# EAGLE board Mode Changer - Robotrox (EAGLE 9.7.0)

Size 221.02 x 156.86 mm. Coordinates in mm from the lower left corner, seen from the top.
Outline: 0,0 221.02,0 221.02,156.86 0,156.86 0,0
Copper layers (1*16): Top 0.035mm / dielectric 1.5mm / Bottom 0.035mm
Design rules "default": minimum track width 6mil, minimum drill 0.35mm, track to track 6mil, track to pad 6mil, pad to pad 6mil, via to via 6mil, smd to smd 6mil, copper to edge 40mil, drill to drill 6mil, minimum pad ring 10mil, minimum via ring 8mil, stop-mask expansion 4mil, vias tented up to drill 0mil, thermal gap 10mil

## Footprints (pad centres in the part's own frame; a part is rotated, then mirrored left to right if it is on the bottom)
BATTERY-GENERIC = drill 1.118 pad 3.15 octagon: + 2.54,0; - -2.54,0
MOTOR = drill 1.118 pad 3.15 octagon: + 2.54,0; - -2.54,0
RESAD1016W63L850D250B = drill 0.83 pad 1.43: 1 -5.08,0; 2 5.08,0
SWITCH-SPDT-PTH-8.5X3.7MM = drill 1.016 pad 1.88: 1 -2.54,0; 2 0,0; 3 2.54,0
DIP762W53P254L1969H508Q16B = drill 0.743 pad 1.343: 1 -3.81,8.89; 2 -3.81,6.35; 3 -3.81,3.81; 4 -3.81,1.27; 5 -3.81,-1.27; 6 -3.81,-3.81; 7 -3.81,-6.35; 8 -3.81,-8.89; 9 3.81,-8.89; 10 3.81,-6.35; 11 3.81,-3.81; 12 3.81,-1.27; 13 3.81,1.27; 14 3.81,3.81; 15 3.81,6.35; 16 3.81,8.89
JHD-162A = drill 1.016 long: 1 -19.05,0; 2 -16.51,0; 3 -13.97,0; 4 -11.43,0; 5 -8.89,0; 6 -6.35,0; 7 -3.81,0; 8 -1.27,0; 9 1.27,0; 10 3.81,0; 11 6.35,0; 12 8.89,0; 13 11.43,0; 14 13.97,0; 15 16.51,0; 16 19.05,0
ARDUINO-UNO-R3-SHIELD = drill 1.016 pad 1.88: 3.3V 24.13,-2.54; 5V 24.13,0; A0 24.13,12.7; A1 24.13,15.24; A2 24.13,17.78; A3 24.13,20.32; A4 24.13,22.86; A5 24.13,25.4; AREF -24.13,-13.97; D2 -24.13,20.32; D3 -24.13,17.78; D4 -24.13,15.24; D5 -24.13,12.7; D6 -24.13,10.16; D7 -24.13,7.62; D8 -24.13,3.81; D9 -24.13,1.27; D10 -24.13,-1.27; D11 -24.13,-3.81; D12 -24.13,-6.35; D13 -24.13,-8.89; GND@0 24.13,2.54; GND@1 24.13,5.08; GND@2 -24.13,-11.43; IOREF 24.13,-7.62; NC 24.13,-10.16; RES 24.13,-5.08; RX -24.13,25.4; SCL -24.13,-19.05; SDA -24.13,-16.51; TX -24.13,22.86; VIN 24.13,7.62

## Placement (x,y rotation side)
BATBATTERY_FOR_MOTORS  9V  [BATTERY-GENERIC]  45.59,8.26 270 top
MSUCTION_MOTOR  MOTOR_HDR  [MOTOR]  8.26,77.61 90 top
MSWEEPER_MOTOR  MOTOR_HDR  [MOTOR]  8.73,45.41 90 top
RLCD_BRIGHTNESS_RESISTOR  2k  [RESAD1016W63L850D250B]  151.42,52.37 90 top
RLCD_INPUT_RESISTOR  220  [RESAD1016W63L850D250B]  181.9,49.83 90 top
SCLEANING/NOT_CLEANING_SWITCH  TOGGLE  [SWITCH-SPDT-PTH-8.5X3.7MM]  93,54.91 0 top
SSUCTION/SWEEPER_SWITCH  TOGGLE  [SWITCH-SPDT-PTH-8.5X3.7MM]  85.38,54.91 0 top
UCLEANER_MOTOR_DRIVER  L293E  [DIP762W53P254L1969H508Q16B]  51.09,51.1 90 top
UDISPLAY_LCD  LCD-16X2JHD-162A  [JHD-162A]  165.39,37.26 0 top
UMODE_CHANGER  ARDUINO-UNO-R3-SHIELD  [ARDUINO-UNO-R3-SHIELD]  161.4,127.02 90 top

## Library data of the parts
BATBATTERY_FOR_MOTORS MSUCTION_MOTOR MSWEEPER_MOTOR RLCD_BRIGHTNESS_RESISTOR RLCD_INPUT_RESISTOR SCLEANING/NOT_CLEANING_SWITCH SSUCTION/SWEEPER_SWITCH UCLEANER_MOTOR_DRIVER UDISPLAY_LCD UMODE_CHANGER = Tinkercad

## Nets
BATBATTERY_FOR_MOTORS+: BATBATTERY_FOR_MOTORS.+ UCLEANER_MOTOR_DRIVER.8
BATBATTERY_FOR_MOTORS-: BATBATTERY_FOR_MOTORS.- MSUCTION_MOTOR.- MSWEEPER_MOTOR.-
MSUCTION_MOTOR_+: MSUCTION_MOTOR.+ UCLEANER_MOTOR_DRIVER.14
MSWEEPER_MOTOR_+: MSWEEPER_MOTOR.+ UCLEANER_MOTOR_DRIVER.11
UDISPLAY_LCD_LED+: RLCD_INPUT_RESISTOR.1 UDISPLAY_LCD.15
UDISPLAY_LCD_VO: RLCD_BRIGHTNESS_RESISTOR.1 UDISPLAY_LCD.3
UMODE_CHANGER_5V: RLCD_INPUT_RESISTOR.2 SCLEANING/NOT_CLEANING_SWITCH.3 SSUCTION/SWEEPER_SWITCH.1 UCLEANER_MOTOR_DRIVER.16 UDISPLAY_LCD.2 UMODE_CHANGER.5V
UMODE_CHANGER_A2: SSUCTION/SWEEPER_SWITCH.2 UMODE_CHANGER.A2
UMODE_CHANGER_A3: SCLEANING/NOT_CLEANING_SWITCH.2 UMODE_CHANGER.A3
UMODE_CHANGER_D2: UCLEANER_MOTOR_DRIVER.10 UMODE_CHANGER.D2
UMODE_CHANGER_D3: UCLEANER_MOTOR_DRIVER.15 UMODE_CHANGER.D3
UMODE_CHANGER_D4: UCLEANER_MOTOR_DRIVER.9 UMODE_CHANGER.D4
UMODE_CHANGER_D8: UDISPLAY_LCD.14 UMODE_CHANGER.D8
UMODE_CHANGER_D9: UDISPLAY_LCD.13 UMODE_CHANGER.D9
UMODE_CHANGER_D10: UDISPLAY_LCD.12 UMODE_CHANGER.D10
UMODE_CHANGER_D11: UDISPLAY_LCD.11 UMODE_CHANGER.D11
UMODE_CHANGER_D12: UDISPLAY_LCD.6 UMODE_CHANGER.D12
UMODE_CHANGER_D13: UDISPLAY_LCD.4 UMODE_CHANGER.D13
UMODE_CHANGER_GND: RLCD_BRIGHTNESS_RESISTOR.2 SCLEANING/NOT_CLEANING_SWITCH.1 SSUCTION/SWEEPER_SWITCH.3 UCLEANER_MOTOR_DRIVER.1 UCLEANER_MOTOR_DRIVER.2 UCLEANER_MOTOR_DRIVER.3 UCLEANER_MOTOR_DRIVER.4 UCLEANER_MOTOR_DRIVER.5 UCLEANER_MOTOR_DRIVER.6 UCLEANER_MOTOR_DRIVER.7 UCLEANER_MOTOR_DRIVER.12 UCLEANER_MOTOR_DRIVER.13 UDISPLAY_LCD.1 UDISPLAY_LCD.5 UDISPLAY_LCD.16 UMODE_CHANGER.GND@0 UMODE_CHANGER.GND@1 UMODE_CHANGER.GND@2

## Tracks (layer width: path | path; a pad name or v marks a point on that pad's centre or on a via)
BATBATTERY_FOR_MOTORS+  (1 unrouted)
BATBATTERY_FOR_MOTORS-  (2 unrouted)
MSUCTION_MOTOR_+  (1 unrouted)
MSWEEPER_MOTOR_+  (1 unrouted)
UDISPLAY_LCD_LED+  (1 unrouted)
UDISPLAY_LCD_VO  (1 unrouted)
UMODE_CHANGER_5V  (5 unrouted)
UMODE_CHANGER_A2  (1 unrouted)
UMODE_CHANGER_A3  (1 unrouted)
UMODE_CHANGER_D2  (1 unrouted)
UMODE_CHANGER_D3  (1 unrouted)
UMODE_CHANGER_D4  (1 unrouted)
UMODE_CHANGER_D8  (1 unrouted)
UMODE_CHANGER_D9  (1 unrouted)
UMODE_CHANGER_D10  (1 unrouted)
UMODE_CHANGER_D11  (1 unrouted)
UMODE_CHANGER_D12  (1 unrouted)
UMODE_CHANGER_D13  (1 unrouted)
UMODE_CHANGER_GND  (17 unrouted)